# Altium PCB JD-ESPFSH-V1.1.PcbDoc
Units mm, origin at the board's own origin, x right, y up, seen from the top; angles counter-clockwise.
Board outline 60 x 30 mm, 2 copper layers (Top Layer, Bottom Layer), stack 1.58 mm thick; 25 components, 20 nets, 83 pads, 101 vias.
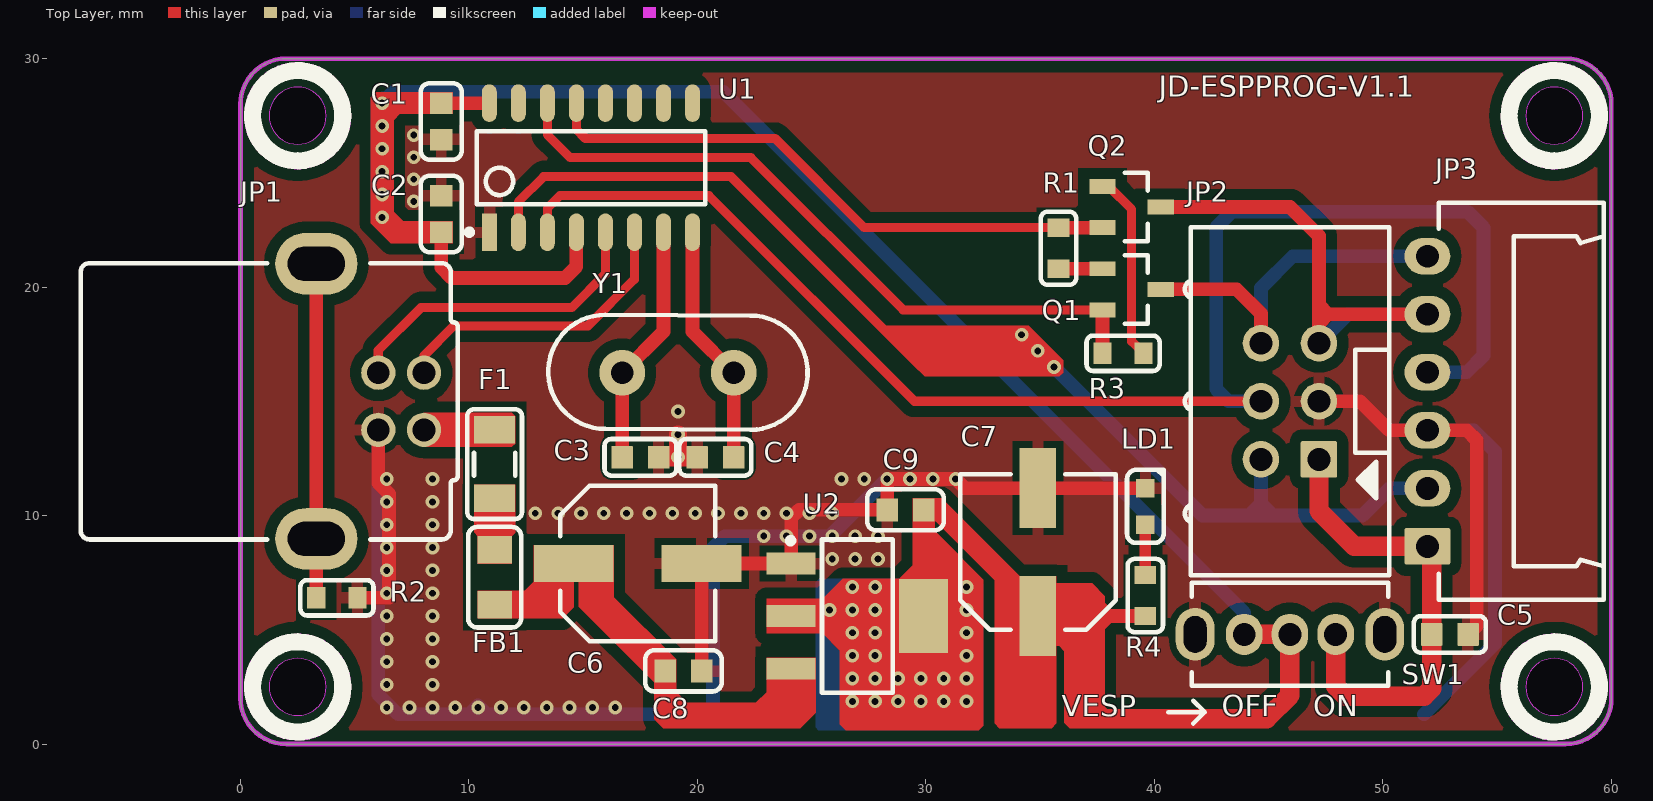
[diagram p0: Top Layer view]
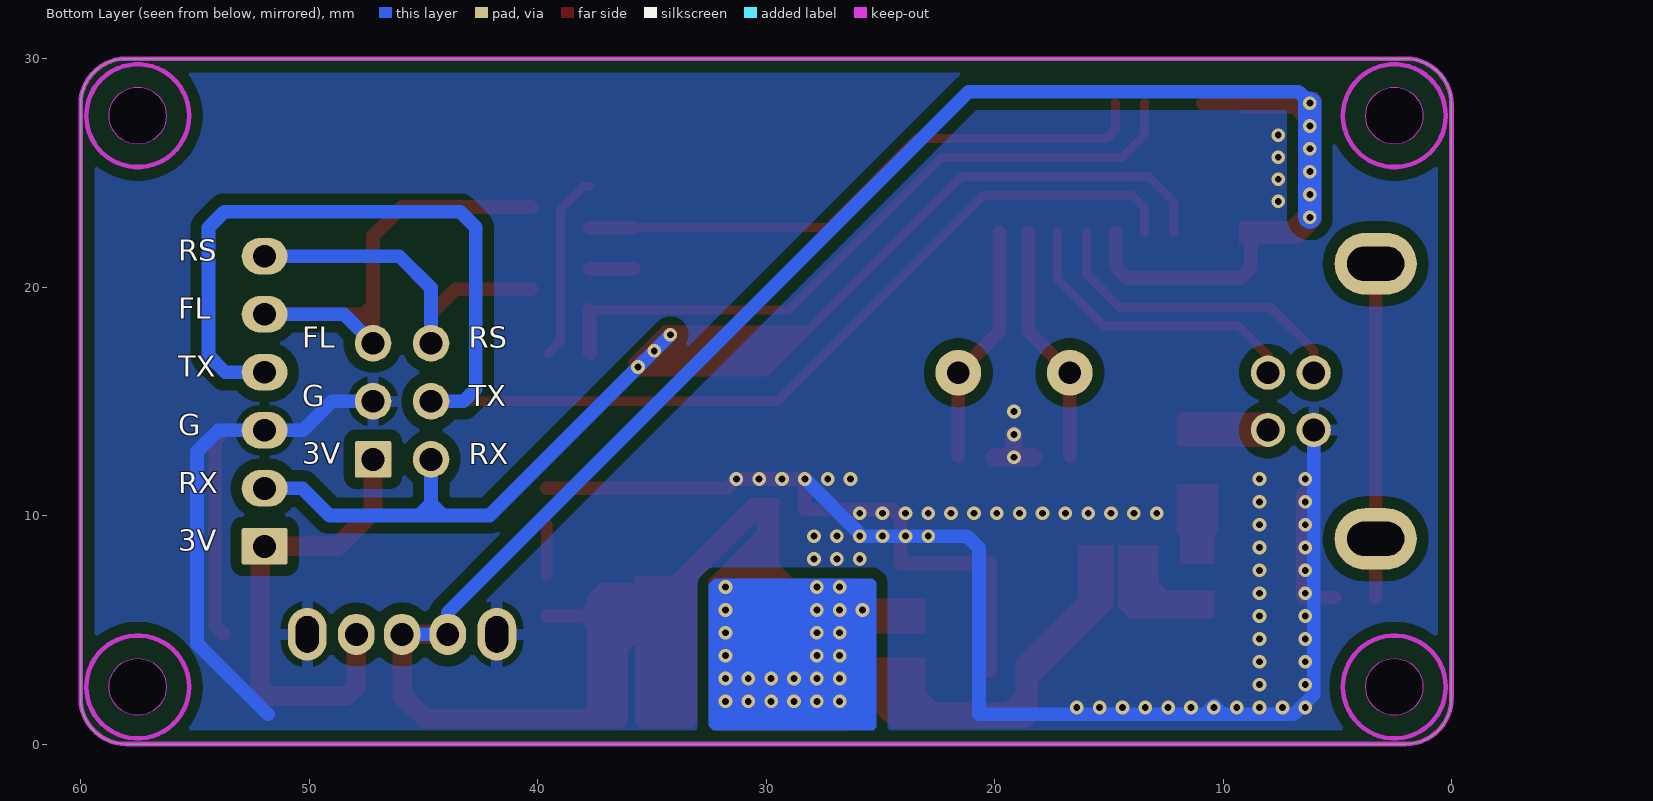
[diagram p1: Bottom Layer view, seen from below]
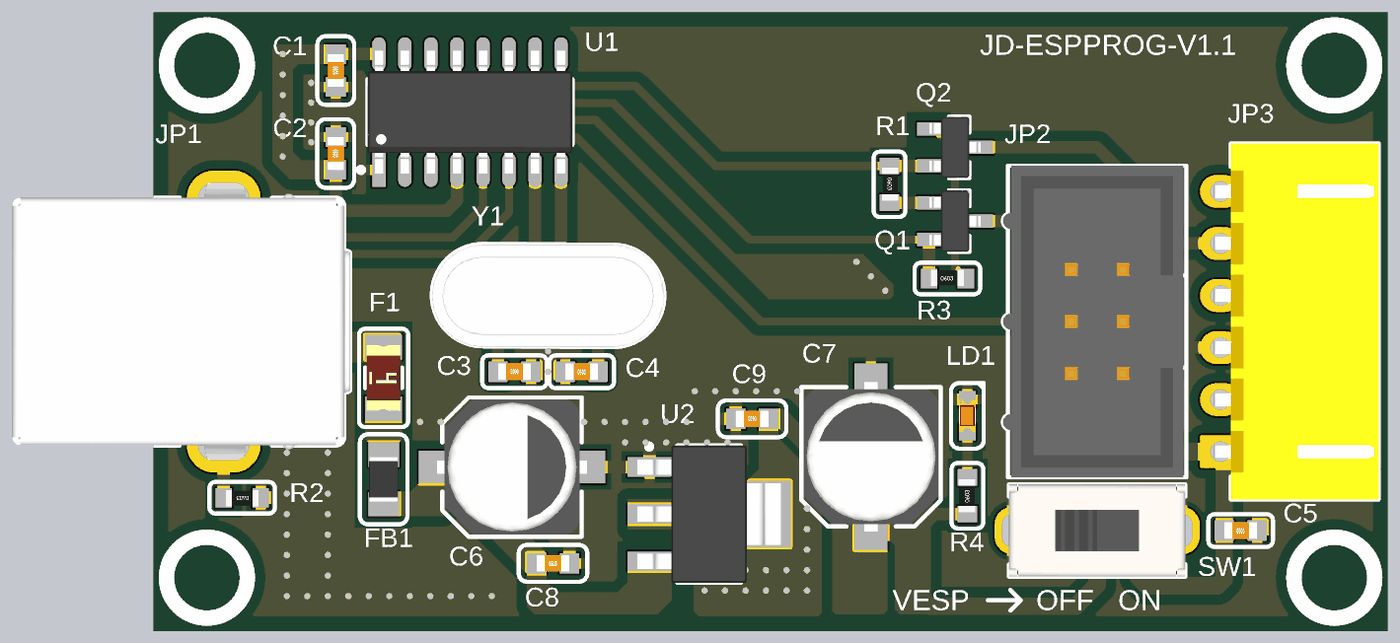
[diagram p2: 3D render of the assembled board from above, using the file's embedded part models]

## Layer stack, top to bottom
Top Solder: solder mask 0.0102, Solder Resist, Dk 3.5
Top Layer: signal copper 0.0356
Dielectric 1: dielectric 1.5086, FR-4, Dk 4.8
Bottom Layer: signal copper 0.0356
Bottom Solder: solder mask 0.0102, Solder Resist, Dk 3.5

## Board outline
0,2 ccw(c2,2) 2,0 58,0 ccw(c58,2) 60,2 60,28 ccw(c58,28) 58,30 2,30 ccw(c2,28) 0,28
cut-out: 1.25,2.5 ccw(c2.5,2.5) 2.5,1.25 ccw(c2.5,2.5) 3.75,2.5 ccw(c2.5,2.5) 2.5,3.75 ccw(c2.5,2.5)
cut-out: 2.5,28.75 ccw(c2.5,27.5) 1.25,27.5 ccw(c2.5,27.5) 2.5,26.25 ccw(c2.5,27.5) 3.75,27.5 ccw(c2.5,27.5)
cut-out: 58.75,27.5 ccw(c57.5,27.5) 57.5,28.75 ccw(c57.5,27.5) 56.25,27.5 ccw(c57.5,27.5) 57.5,26.25 ccw(c57.5,27.5)
cut-out: 57.5,1.25 ccw(c57.5,2.5) 58.75,2.5 ccw(c57.5,2.5) 57.5,3.75 ccw(c57.5,2.5) 56.25,2.5 ccw(c57.5,2.5)

## Design rules (kind name [scope] priority, off if disabled: settings)
Clearance Clearance_Pour [(InPolygon AND InNet('GND'))] p1: gap=0.5 ignorepadtopadclearanceinfootprint=FALSE
Clearance [All] p2: gap=0.254 ignorepadtopadclearanceinfootprint=FALSE except(0: Arc-Hole Track-Hole SMDPad-Hole THPad-Hole Via-Hole Fill-Hole Poly-Hole Region-Hole Text-Hole)
DiffPairsRouting [All] p1: maxlimit=0.4 minlimit=0.3 mostfreqgap=0.381 toplayer_minwidth=0.3 toplayer_maxwidth=0.6 toplayer_prefwidth=0.4 bottomlayer_minwidth=0.3 bottomlayer_maxwidth=0.6 bottomlayer_prefwidth=0.4 maxuncoupledlength=12.7
MinimumSolderMaskSliver [All] p1: minsoldermaskwidth=0.127
PlaneConnect [All] p1: planeconnectstyle=Relief reliefexpansion=0.508 reliefentries=4 reliefconductorwidth=0.4 reliefairgap=0.254
PolygonConnect [All] p1: thpad.connectstyle=Relief thpad.reliefconductorwidth=0.5 thpad.reliefentries=4 thpad.polygonreliefangle="90 Angle" thpad.airgapwidth=0.3 smdpad.connectstyle=Relief smdpad.reliefconductorwidth=0.5 smdpad.reliefentries=4 smdpad.polygonreliefangle="90 Angle" smdpad.airgapwidth=0.3 via.connectstyle=Direct via.reliefconductorwidth=0.5 via.reliefentries=4 via.polygonreliefangle="90 Angle" via.airgapwidth=0.3
RoutingVias [All] p1: holewidth=0.3 width=0.6 viastyle="Through Hole" minholewidth=0.3 minwidth=0.6 maxholewidth=0.6 maxwidth=1
SilkToSilkClearance [All] p1: silktosilkclearance=0.2
SilkToSolderMaskClearance [IsPad] p1: minsilkscreentomaskgap=0.127 clearancetoexposedcopper=TRUE
SolderMaskExpansion [All] p1: expansion=0.102 istentingtop=FALSE
Width [All] p1: maxlimit=2 minlimit=0.254 preferedwidth=0.6
25 further rules are at their usual default settings.

## Classes and differential pairs
differential pair USB: +USB_P -USB_N

## Components (designator, comment, footprint, x,y, rotation, side; value= is the part's Value field where it differs from the comment)
C1 "100nF/16V" CAP-CER0603-0.8H#1 8.785,27.25 r270 top
C2 "100nF/16V" CAP-CER0603-0.8H#1 8.785,23.2 r270 top
C3 "22pF/16V" CAP-CER0603-0.8H#2 17.505,12.55 r180 top
C4 "22pF/16V" CAP-CER0603-0.8H#2 20.785,12.55 r0 top
C5 "100nF/16V" CAP-CER0603-0.8H#2 52.93,4.8 r0 top
C6 "100uF/16V" CAP-ALU-6.3D5.8H-SMD 17.385,7.9 r0 top
C7 "100uF/16V" CAP-ALU-6.3D5.8H-SMD 34.9,8.4 r90 top
C8 "100nF/16V" CAP-CER0603-0.8H#1 19.385,3.2 r0 top
C9 "100nF/16V" CAP-CER0603-0.8H#1 29.1,10.25 r180 top
F1 "6V/2A" FUS-PTC-SMD1206-1.6H 11.12,12.25 r270 top
FB1 "120mR/1.5A 1K@100MHz" IND-C0805-1.1H 11.12,7.3 r270 top
JP1 "TYPE-B-F-4P-RA-V1" CON-USB-B-F-4P-RA-V1-THR 3.32,15 r270 top
JP2 "IDC6S" CON-IDC6-2.54P-9.3H-S-THR 45.93,15 r90 top
JP3 "XH2.54M-1X06R-6H" CON-XH2.54-6R 55.33,15 r90 top
LD1 "RED" LED-IND0603-RED-0.6H 39.6,10.401 r90 top
Q1 "40V/0.6A" SOT23-3-1.1H 39,19.9 r0 top
Q2 "40V/0.6A" SOT23-3-1.1H 39,23.5 r0 top
R1 "1K" RES-CHP0603-0.6H 35.8,21.7 r270 top
R2 "1M" RES-CHP0603-0.6H 4.22,6.4 r180 top
R3 "1K" RES-CHP0603-0.6H 38.625,17.1 r0 top
R4 "10K" RES-CHP0603-0.6H 39.6,6.5 r90 top
SW1 "SS12D07VG4" SW-SLI-1P2T-SS12D07VG4 45.93,4.8 r0 top
U1 "CH340G" SOIC-16M-1.75H 15.335,25.225 r90 top
U2 "TLV1117-3.3" SOT223-4N-1.8H 27,5.6 r0 top
Y1 "12MHz" XTAL-HC49S-3.5H-THR 19.145,16.25 r0 top

## Footprints (in the part's own frame and the unit in brackets; to place one, negate y for a bottom-side part, rotate by r counter-clockwise, add the part's x,y. Pads: shape width x height; smd on the part's side, far side on the other; paste and mask are expansions set on the pad)
CAP-ALU-6.3D5.8H-SMD [mm] "CAP ALU 6.3D5.8H BODY 6.60X6.60 SMD"
  rect 3.5x1.6 smd: 1(-2.8,0.001) 2(2.8,0)
  silkscreen extent -3.4,-3.4 3.4,3.4, body extent -3.65,-3.3 3.65,3.3, height 5.8
CAP-CER0603-0.8H#1 [mm] "CAP CER 0805 0.8 Height SMD Density Level B"
  rect 0.95x1 smd: 1(-0.8,0) 2(0.8,0)
  silkscreen extent -1.68,-0.9 1.68,0.9, body extent -0.8,-0.4 0.8,0.4, height 0.3
CAP-CER0603-0.8H#2 [mm] "CAP CER 0603 0.8 Height SMD Density Level B"
  rrect10% 0.95x1 smd: 1(-0.8,0) 2(0.8,0)
  Top Layer pour cut-out: -0.373,0.5 0.373,0.5 0.373,-0.5 -0.373,-0.5
  silkscreen extent -1.58,-0.8 1.58,0.8, body extent -0.8,-0.4 0.8,0.4, height 0.3
CON-IDC6-2.54P-9.3H-S-THR [mm] "Connector IDC6 Strangle, Pitch 2.54mm, Height 9.3mm"
  rrect10% 1.6x1.6 hole 1: 1(-2.54,-1.27)
  round 1.6 hole 1: 2(-2.54,1.27) 3(0,-1.27) 4(0,1.27) 5(2.54,-1.27) 6(2.54,1.27)
  silkscreen extent -7.61,-4.35 7.61,4.6, body extent -7.61,-4.25 7.61,4.6, height 9.33
CON-USB-B-F-4P-RA-V1-THR [mm] "Connector, USB2.0, Type B, 4-POS, Female, Number 1, Through-Hole"
  round 1.5 hole 1: 1(1.25,4.71) 2(-1.25,4.71) 3(-1.25,2.71) 4(1.25,2.71)
  oval 2.7x3.6 hole 1.5 slot 2.5 at 90 deg: 5(-6.02,0) 6(6.02,0)
  silkscreen extent -6.05,-10.32 6.05,6.18, body extent -7.4,-10.32 7.4,6.18, height 11.1
CON-XH2.54-6R [mm] "Connector, Case: XH2.54, 6-Pins, RighAngle"
  rrect10% 1.6x2 hole 1: 1(-6.35,3.383)
  oval 1.6x2 hole 1: 2(-3.81,3.383) 3(-1.27,3.383) 4(1.27,3.383) 5(3.81,3.383) 6(6.35,3.383)
  silkscreen extent -8.69,-4.33 8.69,2.88, body extent -8.69,-4.33 8.69,3.7, height 5.89
FUS-PTC-SMD1206-1.6H [mm] "FUS PTC RST 1206 SMD"
  rect 1.2x1.8 smd: 1(-1.5,0) 2(1.5,0)
  silkscreen extent -2.4,-1.2 2.4,1.2, body extent -1.6,-0.83 1.6,0.83, height 0.56
IND-C0805-1.1H [mm] "Chip Inductor, 2-Leads, Body 2.00x1.20mm, IPC Low Density"
  rect 1.2x1.5 smd: 1(-1.2,0.01) 2(1.2,0.01)
  silkscreen extent -2.2,-1.16 2.2,1.16, body extent -1.1,-0.7 1.1,0.7, height 1.1
LED-IND0603-RED-0.6H [mm] "LED INDICATION SMD-0603 Height 0.6mm RED"
  rect 0.8x0.8 smd: 1(-0.801,0) 2(0.8,0)
  silkscreen extent -1.6,-0.8 1.6,0.8, body extent -0.8,-0.4 0.8,0.4, height 0.6
RES-CHP0603-0.6H [mm] "RES CHP 1/10W 0603 SMD"
  rect 0.8x0.95 smd: 1(-0.9,0) 2(0.9,0)
  silkscreen extent -1.6,-0.77 1.6,0.77, body extent -0.8,-0.38 0.8,0.43, height 0.45
SOIC-16M-1.75H [mm] "SOP, 16-Leads, Body 9.90x3.90mm, Pitch 1.27mm, IPC Low Density"
  rect 1.65x0.65 smd: 1(-2.825,4.445)
  oval 1.65x0.65 smd: 2(-2.825,3.175) 3(-2.825,1.905) 4(-2.825,0.635) 5(-2.825,-0.635) 6(-2.825,-1.905) 7(-2.825,-3.175) 8(-2.825,-4.445) 9(2.825,-4.445) 10(2.825,-3.175) 11(2.825,-1.905) 12(2.825,-0.635) 13(2.825,0.635) 14(2.825,1.905) 15(2.825,3.175) 16(2.825,4.445)
  silkscreen extent -2.95,-5 1.6,5.44, body extent -3,-5 3,5, height 1.75
SOT23-3-1.1H [mm] "SOT23-3 1.1H SMD"
  rect 1.15x0.65 smd: 1(-1.275,0.9) 2(-1.275,-0.9) 3(1.275,0)
  silkscreen extent -0.3,-1.5 0.7,1.5, body extent -1.25,-1.5 1.25,1.5, height 1.1
SOT223-4N-1.8H [mm] "SOT223, 4-Leads, Body 6.50x7.00mm (avg), Pitch 2.30mm, IPC Medium Density"
  rect 2.15x0.95 smd: 1(-2.9,2.3) 2(-2.9,0) 3(-2.9,-2.3)
  rect 2.15x3.25 smd: 4(2.9,0)
  silkscreen extent -3.05,-3.35 1.55,3.42, body extent -3.5,-3.35 3.5,3.35, height 1.8
SW-SLI-1P2T-SS12D07VG4 [mm] "Switch Slide, 1-Pole, 2-Terminal, 3-Pin, Pitch: 2mm, Body: 8.7x4.4mm,  Heigh: 4.7mm, Knob Height: 4mm"
  oval 1.6x1.8 hole 1: 1(-2,0) 2(0,0) 3(2,0)
  oval 1.7x2.3 hole 1 slot 1.6 at 90 deg: 5(-4.15,0) 6(4.15,0)
  silkscreen extent -4.3,-2.25 4.3,2.25, body extent -4.3,-2.25 4.3,2.25, height 8.71
XTAL-HC49S-3.5H-THR [mm] "CRYSTAL, Case: HC-49S, Body: 11.4x4.8mm, Height: 3.5mm, THR"
  round 2 hole 1: 1(-2.44,0) 2(2.44,0)
  silkscreen extent -5.67,-2.5 5.67,2.54, body extent -5.67,-2.5 5.67,2.5, height 3.78

## Part data
C1 C2 C5 C8 C9: library part "CAPCER0008 0603 100nF/16V", "CAP CER 100nF/16V 10% X7R 0603 SMD", MFR=YAGEO, MFR PN=CC0603KRX7R7BB104, CERT=NA, Class=B, Line=SMT, Mount=SMD, OXIITEK PN=CAPCER0008, Type=EP, Unit=PCS
C3 C4: library part "CAPCER0060 0603 22pF/16V", "CAP CER 22pF/16V 5% C0G 0603 SMD", MFR=KEMET, MFR PN=C0603C220J4GAC7867, CERT=NA, Class=B, Line=SMT, Mount=SMD, OXIITEK PN=CAPCER0060, Type=EP, Unit=PCS
C6 C7: library part "CAPALU0012 6.3X5.8 100uF/16V SMD", "CAP ALU 100uF/16V 20% 2K105 2.2P 6.3X5.8 SMD", MFR=NICHICON, MFR PN=UUD1C101MCL1GS, CERT=NA, Class=B, Line=SMT, Mount=SMD, OXIITEK PN=CAPALU0012, Type=EP, Unit=PCS
F1: library part "FUSPTC0001 1206 6V/2A", "FUS PTC RST 6V 2A 1206 SMD", MFR=BOURNS, MFR PN=MF-NSMF200-2, CERT=NA, Class=B, Line=SMT, Mount=SMD, OXIITEK PN=FUSPTC0001, Type=EP, Unit=PCS
FB1: library part "FILFER0003 0805 120mR/1.5A 1K@100MHz", "FIL FER 1LN 120mR 25% 1.5A 1K@100MHz 0805 SMD", MFR=SUNLORD, MFR PN=UPZ2012E102-1R5TF, CERT=NA, Class=B, Line=SMT, Mount=SMD, OXIITEK PN=FILFER0003, Type=EP, Unit=PCS
JP1: library part "CONUSB0008 TYPE-B-F-4P-RA-V1", "CON USB RCPT TYPE-B 4POS RA V1 THR", MFR=XUNPU, MFR PN=USB-B10-BRW, CERT=NA, Class=B, Line=DIP, Mount=MI, OXIITEK PN=CONUSB0008, Type=EP, Unit=PCS
JP2: library part "CONW2B0010 IDC2.54M-6PV", "CON W2B IDC2.54M-2X3V-9H THR", MFR=XFCN, MFR PN=BH254V-6P, CERT=NA, Class=NA, Line=DIP, Mount=MI, NOTE=NA, OXIITEK PN=CONW2B0010, Type=EP, Unit=PCS
JP3: library part "CONW2B0022 XH2.54M-1X06R-6H", "CON W2B XH2.54M-1X06R-6H THR", MFR=XUNPU, MFR PN=WAFER-XH2.54-6PWZ, CERT=NA, Class=NA, Line=DIP, Mount=MI, NOTE=NA, OXIITEK PN=CONW2B0022, Type=EP, Unit=PCS
LD1: library part "LEDIND0001 0603 RED", "LED IND RED CLR 2V 20mA 0603 SMD", MFR=WURTH, MFR PN=150060SS75000, CERT=NA, Class=B, Line=SMT, Mount=SMD, NOTE="80mcd~220mcd, 130deg", OXIITEK PN=LEDIND0001, Type=EP, Unit=PCS
Q1 Q2: library part "BJTNPN0001 SOT23 40V/0.6A", "BJT NPN 40V 0.6A SOT23-3 SMD", MFR=ONSEMI, MFR PN=MMBT2222ALT1G, CERT=NA, Class=B, Line=SMT, Mount=SMD, OXIITEK PN=BJTNPN0001, Type=EP, Unit=PCS
R1 R3: library part "RESCHP0007 0603 1% 1K", "RES CHP 1K 1% 1/10W 0603 SMD", MFR=YAGEO, MFR PN=RC0603FR-071KL, CERT=NA, Class=B, Line=SMT, Mount=SMD, OXIITEK PN=RESCHP0007, Type=EP, Unit=PCS
R2: library part "RESCHP0036 0603 1% 1M", "RES CHP 1M 1% 1/10W 0603 SMD", MFR=YAGEO, MFR PN=RC0603FR-071ML, CERT=NA, Class=B, Line=SMT, Mount=SMD, OXIITEK PN=RESCHP0036, Type=EP, Unit=PCS
R4: library part "RESCHP0008 0603 1% 10K", "RES CHP 10K 1% 1/10W 0603 SMD", MFR=YAGEO, MFR PN=RC0603FR-0710KL, CERT=NA, Class=B, Line=SMT, Mount=SMD, OXIITEK PN=RESCHP0008, Type=EP, Unit=PCS
SW1: library part "SWTSLI0002 1P2T SS12D07VG4", "SWT SLI 1P2T 30V/50mA SS12D07VG4 4L 4.7H THR", MFR=SHOUHAN, MFR PN="SS12D07VG4 087", CERT=NA, Class=B, Line=DIP, Mount=MI, NOTE="Knob: 4.0mm (4L)", OXIITEK PN=SWTSLI0002, Type=EP, Unit=PCS
U1: library part "ICSINT0001 SOIC16 CH340G", "ICS INT USB-TTL CH340G 16SOIC SMD", MFR=WCH, MFR PN=CH340C, CERT=NA, Class=B, Line=SMT, Mount=SMD, OXIITEK PN=ICSINT0001, Type=EP, Unit=PCS
U2: library part "ICSVRE0001 SOT223 TLV1117-3.3", "ICS VRE TLV1117-33 3V3 0.8A SOT223 SMD", MFR=TI, MFR PN=TLV1117-33CDCYR, CERT=NA, Class=A, Line=SMT, Mount=SMD, OXIITEK PN=ICSVRE0001, Type=EP, Unit=PCS
Y1: library part "XTACRY0006 HC49S-THR 12MHz", "XTA CRY 12MHz 20pF 10PPM HC49S THR", MFR=YXC, MFR PN=X49SD12MSB2SI, CERT=NA, Class=B, Line=DIP, Mount=AI, OXIITEK PN=XTACRY0006, Type=EP, Unit=PCS

## Via types
v1: diameter 0.6, hole 0.3, Top Layer to Bottom Layer, tented both sides, 101 vias

## Nets (pads, with @x,y where several pads share a name; then routed paths per layer and width w, separated by ;. In a path a pad name is that pad's centre, name@x,y a point inside that pad or via, vN(x,y) a via of type N, cw(c..) or ccw(c..) an arc to the next point about the centre after c; other vN are vias at no path point)
+3V3: C1.1 C2.2 C7.1 C9.1 R4.1 SW1.1 SW1.2 U1.4 U1.16 U2.2 U2.4 | length 96.4
  Top Layer w0.6: C2.2 8.785,20.856 9.241,20.4 14.2,20.4 14.7,20.9 U1.4 ; C1.1 U1.16 ; U2.2 U2.4 C9.1 ; C7.1 36.4,5.6 ; 36.8,2.054 36.8,5.2 36.4,5.6 ; 37.6,5.2 38,5.6 37.6,6 ; R4.1 36.4,5.6
  Top Layer w0.85: 36.8,2.054 37.744,1.11 44.91,1.11 45.93,2.13 SW1.2 SW1.1
  Bottom Layer w0.6: v1(6.2,28.05) 6.702,28.552 21.129,28.552 43.93,5.751 SW1.1 SW1.2
  other v1: 26.777,1.868 27.777,1.868 28.777,1.868 29.777,1.868 30.777,1.868 31.777,1.868 26.777,2.868 27.777,2.868 28.777,2.868 29.777,2.868 30.777,2.868 31.777,2.868 26.777,3.868 27.777,3.868 31.777,3.868 26.777,4.868 27.777,4.868 31.777,4.868 25.777,5.868 26.777,5.868 27.777,5.868 31.777,5.868 26.777,6.868 27.777,6.868 31.777,6.868 6.2,23.05 6.2,24.05 6.2,25.05 6.2,26.05 6.2,27.05
+5V: C6.1 C8.1 FB1.2 U2.3
+VUSB: F1.2 FB1.1 | length 2.3
  Top Layer w0.6: F1.2 11.12,8.51 FB1.1
DTR: Q2.2 R1.1 U1.13 | length 26
  Top Layer w0.4: U1.13 14.7,26.9 15.1,26.5 23.4,26.5 27.3,22.6 R1.1
  Top Layer w0.6: R1.1 Q2.2
ESP_FSH: JP2.5 JP3.5 Q2.3 | length 22.9
  Top Layer w0.6: Q2.3 45.933,23.5 47.2,22.233 47.2,19.214 ; JP2.5 47.2,19.214 ; 47.2,18.406 47.604,18.81 ; JP3.5 47.604,18.81 ; 47.2,19.214 47.604,18.81
  Bottom Layer w0.6: JP2.5 48.47,18.81 JP3.5
ESP_RST: JP2.6 JP3.6 Q1.3 | length 16.4
  Top Layer w0.6: Q1.3 43.6,19.9 44.66,18.84 JP2.6
  Bottom Layer w0.6: JP2.6 44.66,19.96 46.05,21.35 JP3.6
ESP_RX0: JP2.2 JP3.2 U1.2 | length 53.6
  Top Layer w0.4: U1.2 12.16,23.727 13.267,24.833 21.467,24.833 29.8,16.5 v1(35.6,16.5)
  Bottom Layer w0.6: v1(34.186,17.914) v1(34.893,17.207) v1(35.6,16.5) 42.1,10 44.127,10 ; JP2.2 44.66,10.533 ; JP3.2 50.29,11.19 49.1,10 45.193,10 ; 44.127,10 44.66,10.533 ; 44.127,10 45.193,10 ; 44.66,10.533 45.193,10
ESP_TX0: JP2.4 JP3.4 U1.3 | length 66.1
  Top Layer w0.4: U1.3 13.43,23.451 13.979,24 20.5,24 29.5,15 JP2.4
  Bottom Layer w0.6: JP2.4 43.245,15 42.7,15.545 42.7,22.607 43.393,23.3 53.7,23.3 54.4,22.6 54.4,17 53.67,16.27 JP3.4
GND: C1.2 C2.1 C3.1 C4.1 C5.2 C6.2 C7.2 C8.2 C9.2 JP1.4 JP2.3 JP3.3 LD1.2 R2.1 SW1.5 SW1.6 U1.1 U2.1 | length 120.9
  Top Layer w0.6: R2.1 6.5,6.4 6.5,10.955 6.03,11.425 JP1.4 ; C8.2 C6.2 U2.1 24.1,9.9 24.45,10.25 C9.2 v1(28.3,11.6) v1(29.3,11.6) v1(30.3,11.6) v1(31.3,11.6) 31.7,11.2 C7.2 LD1.2 ; JP2.3 49,15 50.27,13.73 JP3.3 53.67,13.73 54.1,13.3 54.1,5.17 C5.2
  Top Layer w0.8: C3.1 v1(19.145,12.55) ; v1(19.145,13.55) v1(19.145,12.55) ; C4.1 v1(19.145,12.55)
  Bottom Layer w0.6: JP1.4 6.03,2.17 6.9,1.3 9.994,1.3 ; v1@25.85,9.15 v1(28.3,11.6) ; v1(25.9,9.1) v1(24.9,9.1) v1(23.9,9.1) v1(22.9,9.1) 21.2,9.1 20.683,8.583 20.683,1.3 15.4,1.3 10.785,1.3 ; JP2.3 49,15 50.27,13.73 JP3.3 53.97,13.73 54.9,12.8 54.9,4.4 51.8,1.3 ; 9.994,1.3 10.785,1.3 ; 9.994,1.3 10.389,1.695 10.785,1.3
  other v1: 6.4,1.6 7.4,1.6 8.4,1.6 9.4,1.6 10.4,1.6 11.4,1.6 12.4,1.6 13.4,1.6 14.4,1.6 15.4,1.6 16.4,1.6 6.4,2.6 8.4,2.6 6.4,3.6 8.4,3.6 6.4,4.6 8.4,4.6 6.4,5.6 8.4,5.6 6.4,6.6 8.4,6.6 6.4,7.6 8.4,7.6 25.9,8.1 26.9,8.1 27.9,8.1 6.4,8.6 8.4,8.6 26.9,9.1 27.9,9.1 6.4,9.6 8.4,9.6 12.9,10.1 13.9,10.1 14.9,10.1 15.9,10.1 16.9,10.1 17.9,10.1 18.9,10.1 19.9,10.1 20.9,10.1 21.9,10.1 22.9,10.1 23.9,10.1 24.9,10.1 25.9,10.1 6.4,10.6 8.4,10.6 6.4,11.6 8.4,11.6 26.3,11.6 27.3,11.6 19.145,14.55 7.585,23.75 7.585,24.717 7.585,25.683 7.585,26.65
NetF1_1: F1.1 JP1.1 | length 3.1
  Top Layer w0.6: JP1.1 F1.1
NetJP1_5: JP1.5 JP1.6 R2.2 | length 14.6
  Top Layer w0.6: R2.2 JP1.6 JP1.5
NetLD1_1: LD1.1 R4.2 | length 2.2
  Top Layer w0.5: R4.2 LD1.1@39.6,9.6
NetQ1_1: Q1.1 R1.2 | length 1.9
  Top Layer w0.6: R1.2 Q1.1
NetQ2_1: Q2.1 R3.2 | length 8.2
  Top Layer w0.4: Q2.1 38,24.4 39,23.4 39,17.625 R3.2
RTS: Q1.2 R3.1 U1.14 | length 30.8
  Top Layer w0.4: U1.14 13.43,26.67 14.433,25.667 22.333,25.667 29,19 Q1.2
  Top Layer w0.6: R3.1@37.7,17.1 37.725,17.125 Q1.2
USB_N: JP1.2 U1.6 | length 13.4
  Top Layer w0.4: JP1.2 8.03,17 9.33,18.3 15.206,18.3 17.24,20.334 U1.6
USB_P: JP1.3 U1.5 | length 14.1
  Top Layer w0.4: JP1.3 6.03,17.23 7.9,19.1 14.5,19.1 15.97,20.57 U1.5
VESP: C5.1 JP2.1 JP3.1 SW1.3 | length 20.7
  Top Layer w0.85: JP2.1 47.2,10.2 48.75,8.65 JP3.1 52.13,8.467 C5.1 52.13,2.43 51.8,2.1 48.367,2.1 47.93,2.537 SW1.3
XI: C3.2 U1.7 Y1.1 | length 10.5
  Top Layer w0.6: C3.2@16.705,12.6 Y1.1 18.51,18.055 U1.7
XO: C4.2 U1.8 Y1.2 | length 10.5
  Top Layer w0.6: U1.8 19.78,18.055 Y1.2 C4.2@21.585,12.6
pads on no net: U1.9 U1.10 U1.11 U1.12 U1.15

## Polygon pours and split planes (outlines as drawn)
GND on Top Layer "GND_L01_P001" (solid, remove dead copper, pour order 1): 0,2 ccw(c2,2) 2,0 58,0 ccw(c58,2) 60,2 60,28 ccw(c58,28) 58,30 2,30 ccw(c2,28) 0,28
GND on Bottom Layer "GND_L02_P000" (solid, remove dead copper, pour order 0): 0,2 ccw(c2,2) 2,0 58,0 ccw(c58,2) 60,2 60,28 ccw(c58,28) 58,30 2,30 ccw(c2,28) 0,28

## Keep-outs
Keep-Out Layer:
  circle w0.2: c2.5,2.5 r2.25
  circle w0.2: c2.5,27.5 r2.25
  circle w0.2: c57.5,27.5 r2.25
  circle w0.2: c57.5,2.5 r2.25
  lines w0.2: 0,2 ccw(c2,2) 2,0 58,0 ccw(c58,2) 60,2 60,28 ccw(c58,28) 58,30 2,30 ccw(c2,28) 0,28 0,2

## Other copper
Top Layer:
  region net +3V3: 9.285,27.575 6.975,27.575 6.7,27.3 6.7,23.3 7.125,22.875 9.285,22.875 9.285,21.925 6.575,21.925 5.7,22.8 5.7,28.3 5.925,28.525 9.285,28.525
  region net NetF1_1: 8.03,14.5 11.87,14.5 12.02,14.35 12.02,13.15 11.87,13 8.03,13
  region net +VUSB: 12.02,11.35 12.02,9.24 11.88,9.1 11.88,7.9 10.38,7.9 10.38,9.1 10.22,9.26 10.22,11.35
  region net +5V: 10.38,6.7 12.434,6.7 12.835,7.101 12.835,8.701 14.585,8.701 14.585,5.985 14.1,5.5 10.38,5.5
  region net +5V: 16.335,8.701 16.335,6.425 19.06,3.7 19.06,2.7 18.11,2.7 14.8,6.01 14.8,8.701
  region net +5V: 19.06,3.7 19.06,2.289 19.549,1.8 22.56,1.8 23.025,2.265 23.025,3.775 25.175,3.775 25.175,1.375 24.5,0.7 18.5,0.7 18.11,1.09 18.11,3.7
  region net +3V3: 32.312,0.612 32.5,0.8 32.5,7.2 30.375,9.325 30.375,10.75 29.425,10.75 29.425,7.825 28.825,7.225 26.348,7.225 25.473,6.35 23.025,6.35 23.025,4.85 25.473,4.85 26.233,4.091 26.233,0.867 26.488,0.612
  region net +3V3: 34.899,7.031 37.269,7.031 37.827,6.473 37.827,0.7 36.3,0.7 36.06,0.94 36.06,4.065 35.825,4.3 34.899,4.3
  region net +3V3: 29.425,10.75 30.699,10.75 34.099,7.35 35.699,7.35 35.699,3.85 35.699,0.899 35.5,0.7 33.2,0.7 33,0.9 33,7.175 30.425,9.75 29.425,9.75
  region net ESP_RX0: 27.726,18.3 29.937,16.089 35.842,16.089 36,16.247 36,16.8 34.5,18.3
  pour cut-out: 9.72,15.01 12.52,15.01 12.52,4.95 9.72,4.95
Bottom Layer:
  region net +3V3: 5.7,23.05 5.7,28.05 cw(c6.2,28.05) 6.7,28.05 6.7,23.05 cw(c6.2,23.05)
  region net +3V3: 25.33,7.23 32.27,7.23 32.5,7 32.5,0.8 32.312,0.612 25.288,0.612 25.175,0.725 25.175,7.075

## Silkscreen, mask and mechanical layers (free items; w line width, h text height)
Top Overlay:
  region: 2.5,4.2 ccw(c2.5,2.5) 4.2,2.5 4.75,2.5 cw(c2.5,2.5) 2.5,4.75
  region: 2.5,0.8 ccw(c2.5,2.5) 0.8,2.5 0.25,2.5 cw(c2.5,2.5) 2.5,0.25
  region: 0.8,27.5 ccw(c2.5,27.5) 2.5,29.2 2.5,29.75 cw(c2.5,27.5) 0.25,27.5
  region: 4.2,27.5 ccw(c2.5,27.5) 2.5,25.8 2.5,25.25 cw(c2.5,27.5) 4.75,27.5
  region: 57.5,29.2 ccw(c57.5,27.5) 59.2,27.5 59.75,27.5 cw(c57.5,27.5) 57.5,29.75
  region: 57.5,25.8 ccw(c57.5,27.5) 55.8,27.5 55.25,27.5 cw(c57.5,27.5) 57.5,25.25
  region: 59.2,2.5 ccw(c57.5,2.5) 57.5,0.8 57.5,0.25 cw(c57.5,2.5) 59.75,2.5
  region: 55.8,2.5 ccw(c57.5,2.5) 57.5,4.2 57.5,4.75 cw(c57.5,2.5) 55.25,2.5
  lines w0.2: 0.25,2.5 cw(c2.5,2.5) 2.5,0.25 2.5,0.8 ccw(c2.5,2.5) 0.8,2.5 ; 0.25,27.5 ccw(c2.5,27.5) 2.5,29.75 ; 0.8,27.5 ccw(c2.5,27.5) 2.5,29.2 ; 40.6,1.4 42.2,1.4 ; 41.7,0.9 42.2,1.4 ; 41.7,1.9 42.2,1.4 ; 57.5,0.25 cw(c57.5,2.5) 59.75,2.5 ; 57.5,0.8 cw(c57.5,2.5) 59.2,2.5 ; 57.5,29.2 ccw(c57.5,27.5) 59.2,27.5 ; 57.5,29.75 ccw(c57.5,27.5) 59.75,27.5 ; 2.5,4.2 ccw(c2.5,2.5) 4.2,2.5 4.75,2.5 cw(c2.5,2.5) 2.5,4.75 2.5,4.2 ; 2.5,25.25 cw(c2.5,27.5) 4.75,27.5 4.2,27.5 ccw(c2.5,27.5) 2.5,25.8 2.5,25.25 ; 55.25,2.5 ccw(c57.5,2.5) 57.5,4.75 57.5,4.2 cw(c57.5,2.5) 55.8,2.5 55.25,2.5 ; 55.25,27.5 cw(c57.5,27.5) 57.5,25.25 57.5,25.8 ccw(c57.5,27.5) 55.8,27.5 55.25,27.5
  text "JD-ESPPROG-V1.1" at 40.197,28.018 h1.6
  text "VESP" at 35.947,0.918 h1.6
  text "OFF" at 42.95,0.918 h1.6
  text "ON" at 46.95,0.918 h1.6
Bottom Overlay:
  text "RS" at 55.727,20.838 h1.6
  text "FL" at 55.727,18.298 h1.6
  text "RS" at 43,17.028 h1.6
  text "FL" at 50.29,17.028 h1.6
  text "TX" at 55.727,15.758 h1.6
  text "TX" at 43,14.488 h1.6
  text "G" at 50.29,14.488 h1.6
  text "G" at 55.727,13.218 h1.6
  text "RX" at 43,11.948 h1.6
  text "3V" at 50.29,11.954 h1.6
  text "RX" at 55.727,10.678 h1.6
  text "3V" at 55.727,8.144 h1.6
Board:
  circle w0.2: c2.5,2.5 r1.25
  circle w0.2: c2.5,27.5 r1.25
  circle w0.2: c57.5,27.5 r1.25
  circle w0.2: c57.5,2.5 r1.25
  lines w0.2: 0,2 ccw(c2,2) 2,0 58,0 ccw(c58,2) 60,2 60,28 ccw(c58,28) 58,30 2,30 ccw(c2,28) 0,28 0,2
Guideline:
  lines w0.1: -7,17.774 -1,17.774 ; -1,15 45,15 ; 18.51,20.4 19.78,20.4 ; 5.7,23.05 ccw(c6.2,23.05) 6.7,23.05 6.7,28.05 ccw(c6.2,28.05) 5.7,28.05 5.7,23.05 ; 166.5,15 166.5,15
  lines w0.2: 0,2 0,0 2,0 ; 0,28 0,30 2,30 ; 24.1,5.6 24.1,7.9 ; 24.5,6.35 24.5,7.15 ; 58,0 60,0 60,2 ; 58,30 60,30 60,28
Top Sheet:
  drawing of 69 lines, arcs and shapes, not listed
  text "APPROVALS" at 74.033,-59.007 h2
  text ".PrjTitle" at 114.43,-60.239 h2.5
  text "Title:" at 103,-60.279 h2
  text "ENG:" at 58.55,-62.81 h2.5
  text ".PrjEngineer" at 64.9,-62.815 h2.5
  text ".PrjDate" at 91.429,-62.987 h2.5
  text "Project:" at 103,-63.92 h2
  text ".PrjProjectName" at 114.43,-64.146 h2.2
  text "Rev:" at 153.8,-66.615 h2
  text "Model:" at 103,-66.644 h2
  text ".PrjModelName" at 114.43,-66.686 h2.2
  text ".PrjModelRev" at 161.42,-66.699 h2.2
  text "DSN:" at 58.55,-67.89 h2.5
  text "'.PrjDrawnBy'" at 64.9,-67.895 h2.5
  text "Part:" at 103,-69.155 h2
  text "Rev:" at 153.8,-69.155 h2
  text ".PrjPartName" at 114.43,-69.226 h2.2
  text ".PrjPartRev" at 161.42,-69.226 h2.2
  text ".PrjMaterial" at 114.43,-71.633 h2.2
  text "Material:" at 103,-71.724 h2
  text ".Print_Scale" at 153.8,-71.766 h2.2
  text "CHK:" at 58.55,-72.97 h2.5
  text ".PrjCheckedBy" at 64.9,-72.975 h2.5
  text "Sheet:" at 103,-74.262 h2
  text "Size:" at 153.8,-74.262 h2
  text "1 Of 1" at 114.43,-74.322 h2.2
  text "A4" at 161.422,-74.321 h2.2
  text ".PrjOrg" at 44.664,-75.816 h3
  text "DSN Name:" at 103,-76.787 h2
  text ".Pcb_File_Name_No_Path" at 114.43,-76.862 h2.2
  text "APR:" at 58.552,-78.055 h2.5
  text ".PrjApprovedBy" at 64.9,-78.055 h2.5
  text ".Layer_Name" at 114.43,-79.205 h2.2
  text "DWG Name:" at 103,-79.327 h2
Bottom Sheet:
  drawing of 69 lines, arcs and shapes, not listed
  text "APPROVALS" at -18.033,-59.007 h2
  text ".PrjTitle" at -58.43,-60.239 h2.5
  text "Title:" at -47,-60.279 h2
  text "ENG:" at -2.55,-62.81 h2.5
  text ".PrjEngineer" at -8.9,-62.815 h2.5
  text ".PrjDate" at -35.429,-62.987 h2.5
  text "Project:" at -47,-63.92 h2
  text ".PrjProjectName" at -58.43,-64.146 h2.2
  text "Rev:" at -97.8,-66.615 h2
  text "Model:" at -47,-66.644 h2
  text ".PrjModelName" at -58.43,-66.686 h2.2
  text ".PrjModelRev" at -105.42,-66.699 h2.2
  text "DSN:" at -2.55,-67.89 h2.5
  text "'.PrjDrawnBy'" at -8.9,-67.895 h2.5
  text "Rev:" at -97.8,-69.155 h2
  text "Part:" at -47,-69.155 h2
  text ".PrjPartRev" at -105.42,-69.226 h2.2
  text ".PrjPartName" at -58.43,-69.226 h2.2
  text ".PrjMaterial" at -58.43,-71.633 h2.2
  text "Material:" at -47,-71.724 h2
  text ".Print_Scale" at -97.8,-71.766 h2.2
  text "CHK:" at -2.55,-72.97 h2.5
  text ".PrjCheckedBy" at -8.9,-72.975 h2.5
  text "Size:" at -97.8,-74.262 h2
  text "Sheet:" at -47,-74.262 h2
  text "A4" at -105.422,-74.321 h2.2
  text "1 Of 1" at -58.43,-74.322 h2.2
  text ".PrjOrg" at 11.336,-75.816 h3
  text "DSN Name:" at -47,-76.787 h2
  text ".Pcb_File_Name_No_Path" at -58.43,-76.862 h2.2
  text ".PrjApprovedBy" at -8.9,-78.055 h2.5
  text "APR:" at -2.552,-78.055 h2.5
  text "DWG Name:" at -47,-79.327 h2
  text ".Layer_Name" at -58.43,-79.402 h2.2

## Text inside footprints (layer, text, board x,y; h text height)
JP2: Top Assembly "1" at 47.715,10.74 h1.6 r90; Top Assembly "2" at 45.175,10.739 h1.6 r90; Top Assembly "5" at 47.707,18.683 h1.6 r90; Top Assembly "6" at 45.167,18.684 h1.6 r90; Top Value "1" at 47.715,10.74 h1.6 r90; Top Value "2" at 45.175,10.739 h1.6 r90; Top Value "5" at 47.707,18.683 h1.6 r90; Top Value "6" at 45.167,18.684 h1.6 r90; Top MI Assembly "1" at 47.715,10.74 h1.6 r90; Top MI Assembly "2" at 45.175,10.739 h1.6 r90; Top MI Assembly "5" at 47.707,18.683 h1.6 r90; Top MI Assembly "6" at 45.167,18.684 h1.6 r90